# EAGLE board Shield_Slave_1_layer (EAGLE 9.1.0)
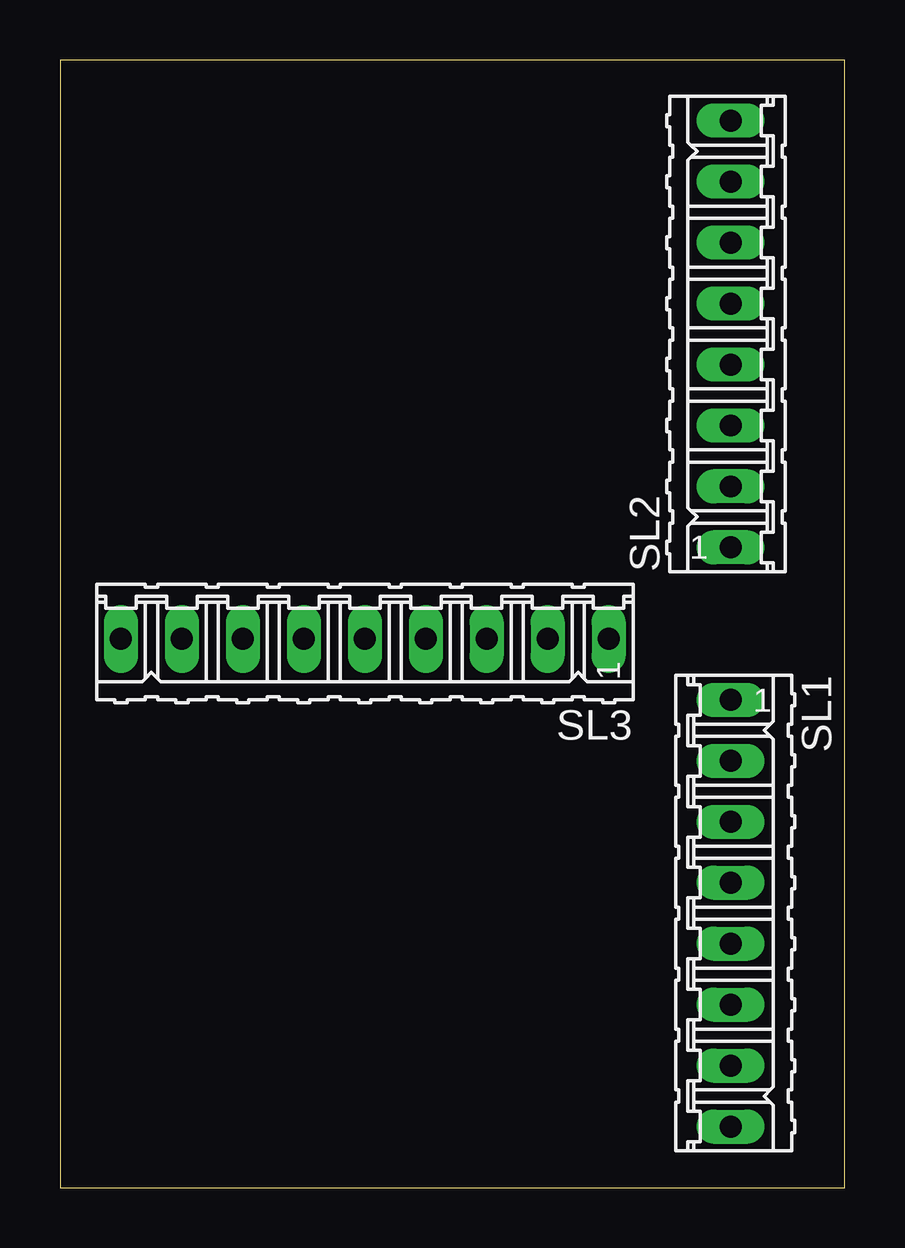
[diagram p0: board, top side]
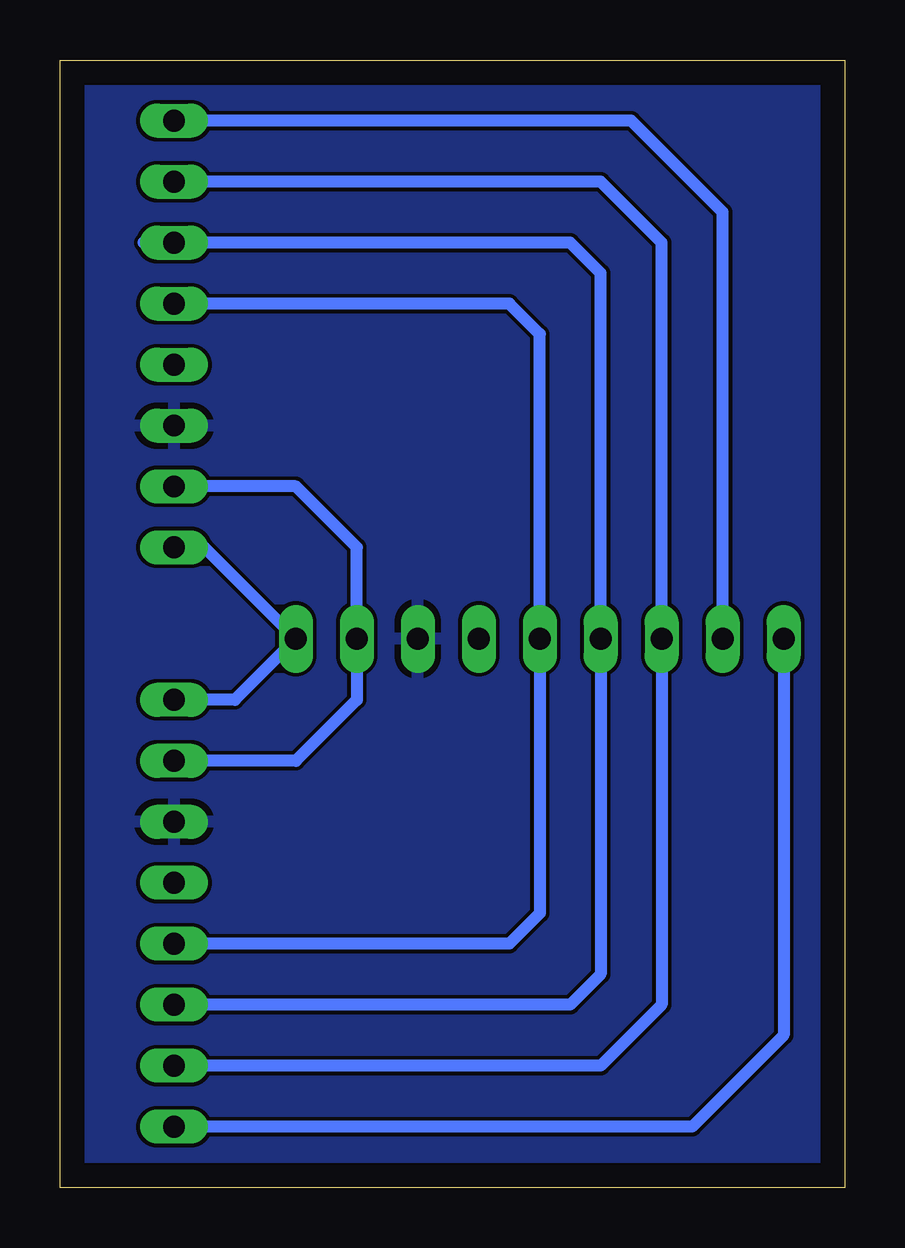
[diagram p1: board, bottom side, seen from below]

Size 32.69 x 46.98 mm. Coordinates in mm from the lower left corner, seen from the top.
Outline: 0,0 32.69,0 32.69,46.98 0,46.98 0,0
Copper layers (1*16): Top 0.035mm / dielectric 1.5mm / Bottom 0.035mm
Design rules "default": minimum track width 6mil, minimum drill 0.35mm, track to track 6mil, track to pad 6mil, pad to pad 6mil, via to via 6mil, smd to smd 6mil, copper to edge 40mil, drill to drill 6mil, minimum pad ring 10mil, minimum via ring 8mil, stop-mask expansion 4mil, vias tented up to drill 0mil, thermal gap 10mil

## Footprints (pad centres in the part's own frame; a part is rotated, then mirrored left to right if it is on the bottom)
08P = drill 0.914 long: 1 -8.89,0; 2 -6.35,0; 3 -3.81,0; 4 -1.27,0; 5 1.27,0; 6 3.81,0; 7 6.35,0; 8 8.89,0
09P = drill 0.914 long: 1 -10.16,0; 2 -7.62,0; 3 -5.08,0; 4 -2.54,0; 5 0,0; 6 2.54,0; 7 5.08,0; 8 7.62,0; 9 10.16,0

## Placement (x,y rotation side)
SL1  [08P]  27.94,11.43 270 top
SL2  [08P]  27.94,35.56 90 top
SL3  [09P]  12.7,22.86 180 top

## Library data of the parts
SL1-SL3 = con-amp-quick; OC_FARNELL: unknown; OC_NEWARK: unknown

## Nets
3V3: SL1.1 SL2.1 SL3.1
GND: SL1.3 SL2.3 SL3.3
MISO: SL1.5 SL2.5 SL3.5
MOSI: SL1.6 SL2.6 SL3.6
RST: SL1.2 SL2.2 SL3.2
SCK: SL1.7 SL2.7 SL3.7
SDA1: SL2.8 SL3.8
SDA2: SL1.8 SL3.9

## Tracks (layer width: path | path; a pad name or v marks a point on that pad's centre or on a via)
3V3
  Bottom 0.508: SL2.1 26.67,26.67 SL3.1 25.4,20.32 SL1.1
GND
  pour Bottom: 0,46.99 33.02,46.99 33.02,0 0,0
MISO
  Bottom 0.508: SL2.5 13.97,36.83 12.7,35.56 SL3.5 12.7,11.43 13.97,10.16 SL1.5
MOSI
  Bottom 0.508: 29.21,39.37 SL2.6 11.43,39.37 10.16,38.1 SL3.6 10.16,8.89 11.43,7.62 SL1.6
RST
  Bottom 0.508: SL2.2 22.86,29.21 20.32,26.67 SL3.2 20.32,20.32 22.86,17.78 SL1.2
SCK
  Bottom 0.508: SL2.7 10.16,41.91 7.62,39.37 SL3.7 7.62,7.62 10.16,5.08 SL1.7
SDA1
  Bottom 0.508: SL3.8 5.08,40.64 8.89,44.45 SL2.8
SDA2
  Bottom 0.508: SL3.9 2.54,6.35 6.35,2.54 SL1.8